# Altium PCB CH32H417QEU-R1.PcbDoc (part 4 of 6)
Units mm, origin at the board's own origin, x right, y up, seen from the top; angles counter-clockwise.
Board outline 125 x 85 mm, 4 copper layers (Top Layer, Layer 1, Layer 2, Bottom Layer), stack 0.603 mm thick; 271 components, 256 nets, 1068 pads, 903 vias.
Unrouted connection lines stored in the file: 143.
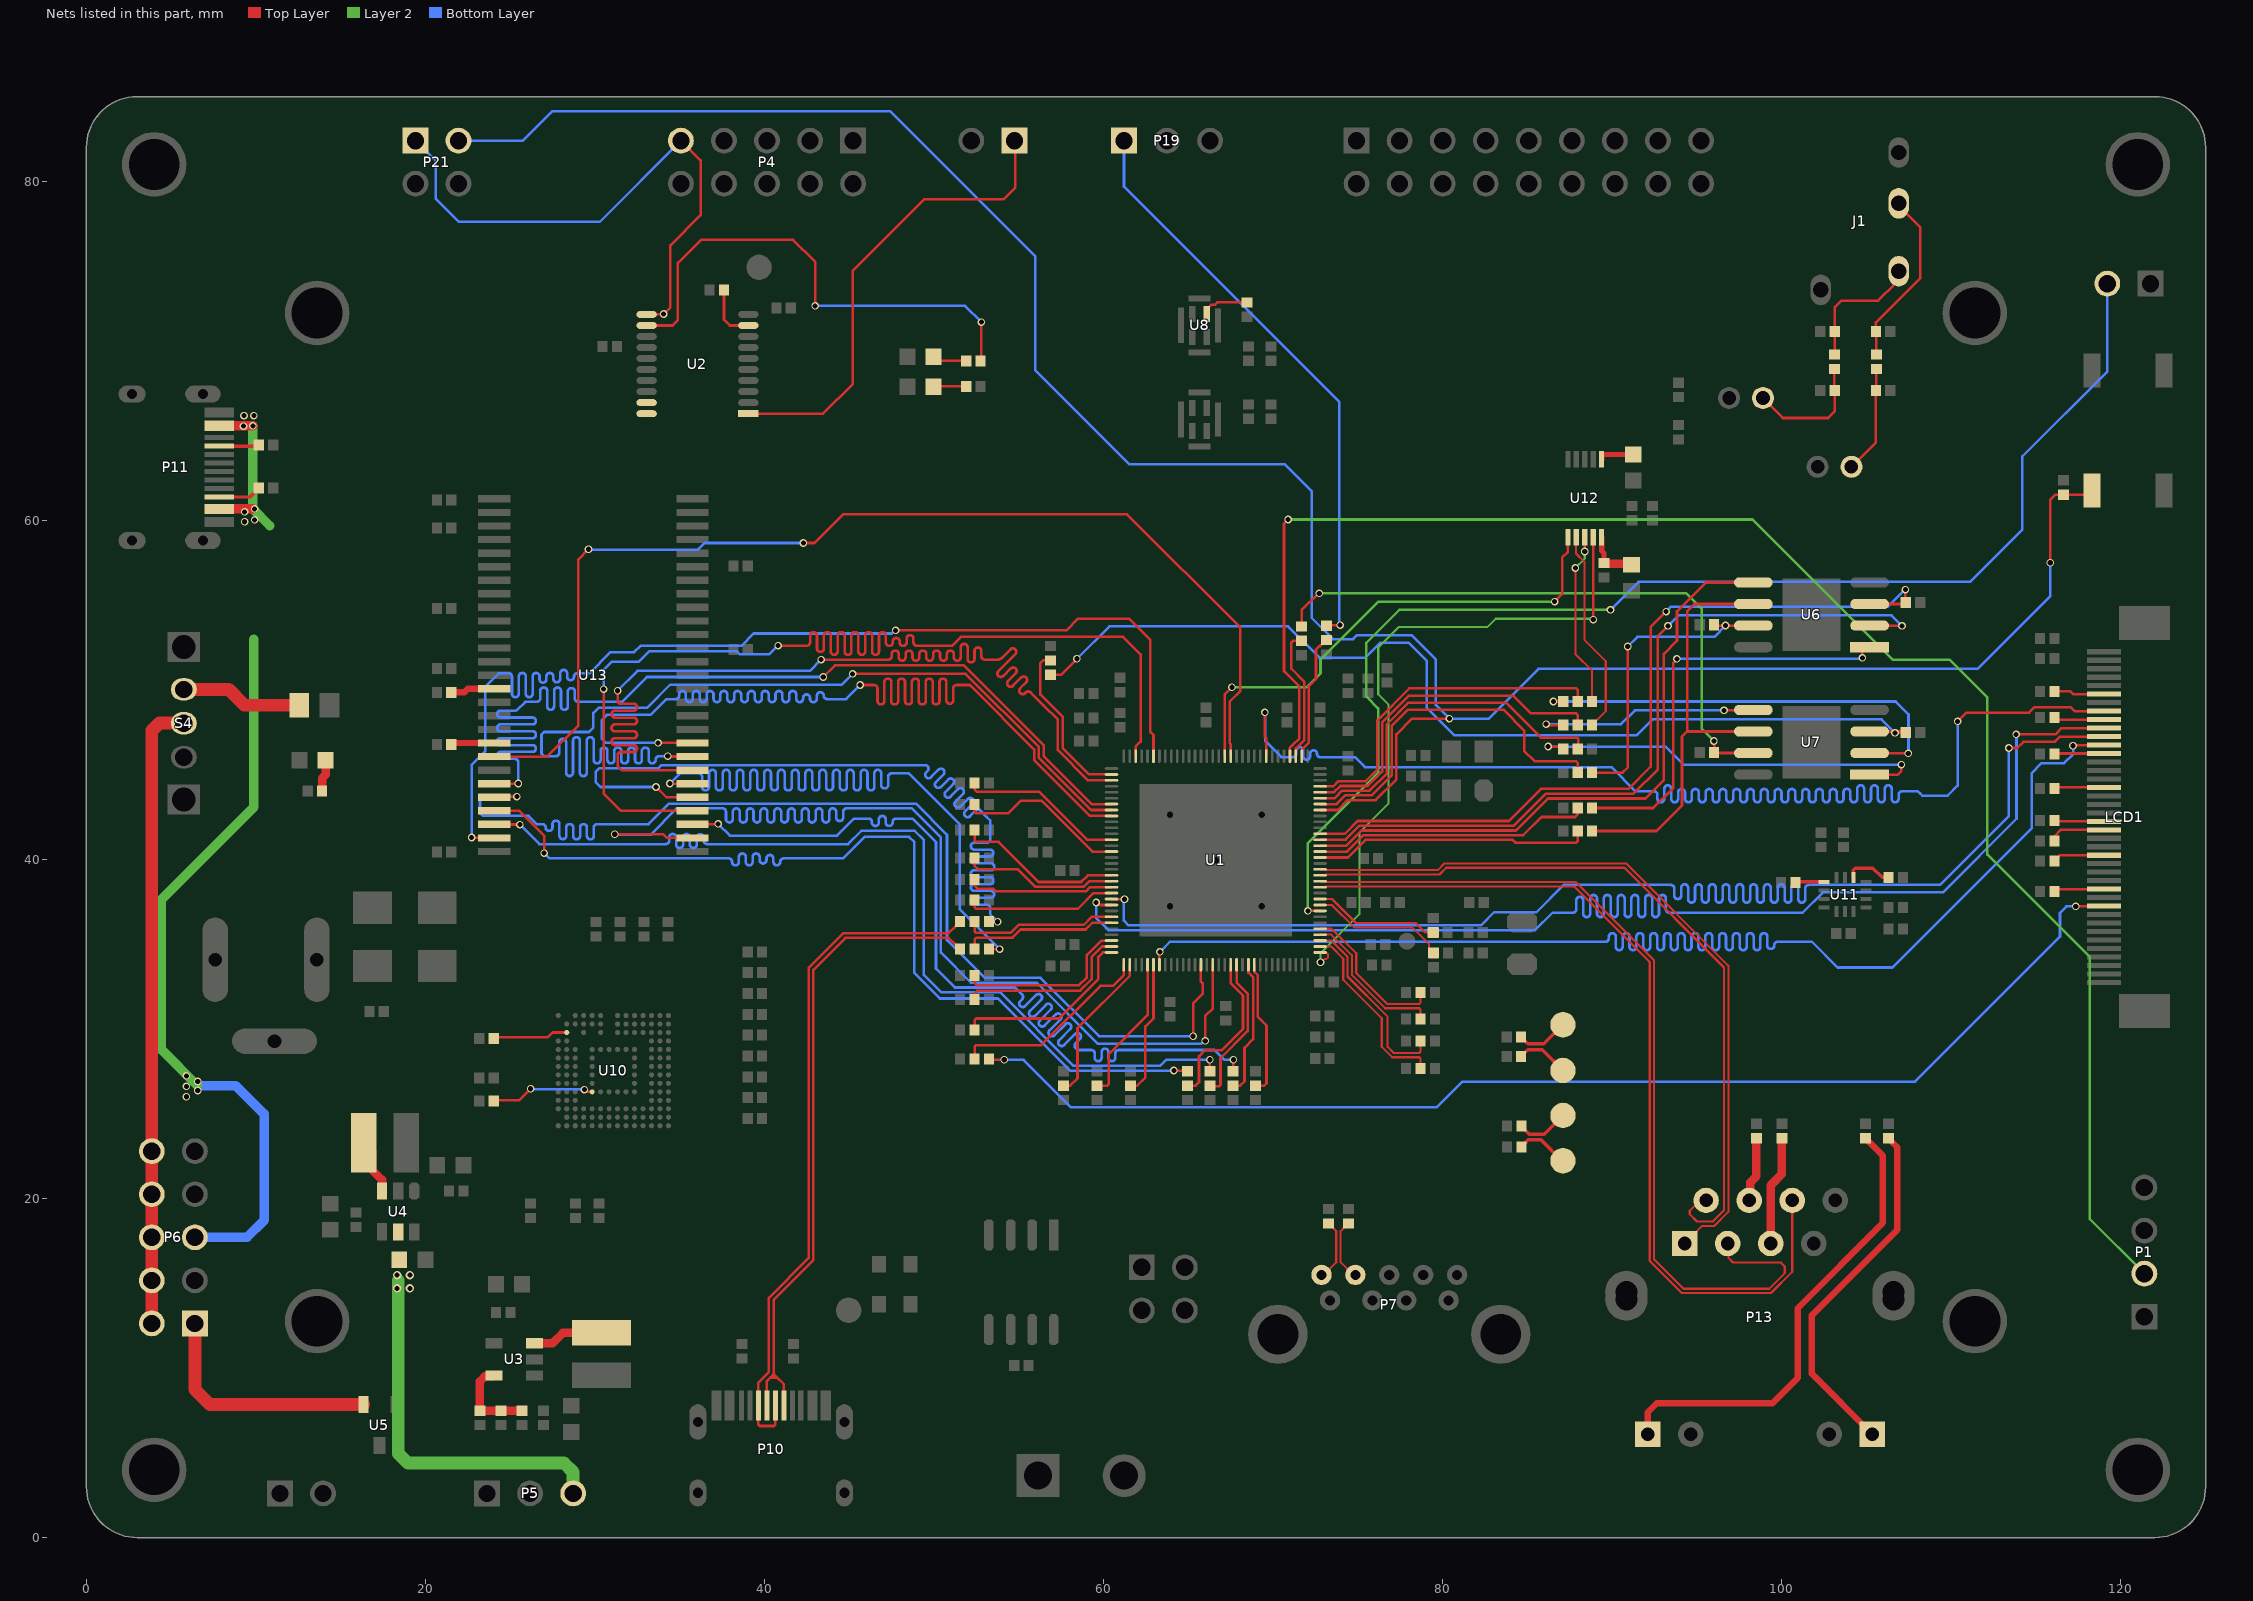
[diagram p6: the nets of this part, all layers, seen from the top]

## Via types
v1: diameter 0.45, hole 0.3, Top Layer to Bottom Layer, tented both sides, 534 vias
v2: diameter 0.5, hole 0.3, Top Layer to Bottom Layer, tented both sides, 320 vias
v3: diameter 0.711, hole 0.406, Top Layer to Bottom Layer, tented both sides, 24 vias
v4: diameter 0.508, hole 0.305, Top Layer to Bottom Layer, tented both sides, 22 vias
v5: diameter 0.7, hole 0.4, Top Layer to Bottom Layer, tented both sides, 3 vias

## Nets (pads, with @x,y where several pads share a name; then routed paths per layer and width w, separated by ;. In a path a pad name is that pad's centre, name@x,y a point inside that pad or via, vN(x,y) a via of type N, cw(c..) or ccw(c..) an arc to the next point about the centre after c; other vN are vias at no path point) (continued)
LCD_R4: LCD1.33 U1.40 | length 84.5
  Top Layer w0.152: v1(69.508,48.678) 69.516,48.67 69.516,47.245 69.591,47.169 U1.40@69.591,46.092 ; v1(110.374,48.144) 110.896,48.666 114.581,48.666 114.886,48.971 117.051,48.971 117.271,48.75 LCD1.33@118.999,48.75
  Bottom Layer w0.152: v1(69.508,48.678) 69.536,48.65 69.536,46.985 70.487,46.033 71.087,46.033 71.163,46.033 ccw(c71.163,46.236) 71.366,46.236 71.366,46.421 cw(c71.57,46.421) 71.773,46.421 71.773,46.093 ccw(c71.976,46.093) 72.179,46.093 72.179,46.236 cw(c72.382,46.236) 72.586,46.236 ccw(c72.789,46.236) 72.789,46.033 74.205,46.033 74.825,46.033 75.416,45.441 89.951,45.441 91.373,44.02 91.982,44.02 92.464,44.02 cw(c92.464,43.817) 92.667,43.817 92.667,43.578 ccw(c92.871,43.578) 93.074,43.578 93.074,44.17 cw(c93.277,44.17) 93.48,44.17 93.48,43.578 ccw(c93.683,43.578) 93.887,43.578 93.887,43.954 cw(c94.09,43.954) 94.293,43.954 94.293,43.578 ccw(c94.496,43.578) 94.699,43.578 94.699,43.954 cw(c94.903,43.954) 95.106,43.954 95.106,43.578 ccw(c95.309,43.578) 95.512,43.578 95.512,43.954 cw(c95.715,43.954) 95.919,43.954 95.919,43.578 ccw(c96.122,43.578) 96.325,43.578 96.325,43.954 cw(c96.528,43.954) 96.731,43.954 96.731,43.578 ccw(c96.935,43.578) 97.138,43.578 97.138,43.954 cw(c97.341,43.954) 97.544,43.954 97.544,43.578 ccw(c97.747,43.578) 97.951,43.578 97.951,43.954 cw(c98.154,43.954) 98.357,43.954 98.357,43.578 ccw(c98.56,43.578) 98.763,43.578 98.763,43.954 cw(c98.967,43.954) 99.17,43.954 99.17,43.578 ccw(c99.373,43.578) 99.576,43.578 99.576,43.954 cw(c99.779,43.954) 99.983,43.954 99.983,43.578 ccw(c100.186,43.578) 100.389,43.578 100.389,43.954 cw(c100.592,43.954) 100.795,43.954 100.795,43.578 ccw(c100.999,43.578) 101.202,43.578 101.202,43.954 cw(c101.405,43.954) 101.608,43.954 101.608,43.578 ccw(c101.811,43.578) 102.015,43.578 102.015,43.954 cw(c102.218,43.954) 102.421,43.954 102.421,43.578 ccw(c102.624,43.578) 102.827,43.578 102.827,43.954 cw(c103.031,43.954) 103.234,43.954 103.234,43.578 ccw(c103.437,43.578) 103.64,43.578 103.64,43.967 cw(c103.843,43.967) 104.047,43.967 104.047,43.578 ccw(c104.25,43.578) 104.453,43.578 104.453,44.17 cw(c104.656,44.17) 104.859,44.17 104.859,43.578 ccw(c105.063,43.578) 105.266,43.578 105.266,44.17 cw(c105.469,44.17) 105.672,44.17 105.672,43.578 ccw(c105.875,43.578) 106.079,43.578 106.079,44.17 cw(c106.282,44.17) 106.485,44.17 106.485,43.578 ccw(c106.688,43.578) 106.891,43.578 106.891,43.817 cw(c107.095,43.817) 107.095,44.02 108.033,44.02 108.159,43.893 108.286,43.767 109.79,43.767 110.374,44.35 v1(110.374,48.144)
LCD_R5: LCD1.31 U1.88 | length 84.6
  Top Layer w0.152: v1(59.559,37.459) 59.64,37.459 59.782,37.317 U1.88@60.466,37.317 ; v1(113.823,47.382) 116.139,47.382 116.508,47.75 LCD1.31@118.999,47.75
  Bottom Layer w0.152: v1(59.559,37.459) 59.559,36.549 60.276,35.832 85.457,35.832 86.483,36.857 86.834,36.857 87.68,36.857 ccw(c87.68,37.061) 87.883,37.061 87.883,37.597 cw(c88.086,37.597) 88.289,37.597 88.289,36.805 ccw(c88.492,36.805) 88.696,36.805 88.696,37.704 cw(c88.899,37.704) 89.102,37.704 89.102,36.805 ccw(c89.305,36.805) 89.508,36.805 89.508,37.704 cw(c89.712,37.704) 89.915,37.704 89.915,36.805 ccw(c90.118,36.805) 90.321,36.805 90.321,37.704 cw(c90.524,37.704) 90.728,37.704 90.728,36.805 ccw(c90.931,36.805) 91.134,36.805 91.134,37.704 cw(c91.337,37.704) 91.54,37.704 91.54,36.805 ccw(c91.744,36.805) 91.947,36.805 91.947,37.704 cw(c92.15,37.704) 92.353,37.704 92.353,36.805 ccw(c92.556,36.805) 92.76,36.805 92.76,37.704 cw(c92.963,37.704) 93.166,37.704 93.166,37.061 ccw(c93.369,37.061) 93.369,36.857 93.852,36.857 101.231,36.857 102.432,38.059 109.502,38.059 113.846,42.402 113.846,47.36 v1(113.823,47.382)
LCD_R6: LCD1.30 U1.87 | length 84.6
  Top Layer w0.152: U1.87@60.466,37.667 U1.87@60.466,37.667 61.215,37.665 v1(61.228,37.652) ; v1(113.392,46.573) 113.89,46.573 114.257,46.94 116.093,46.94 116.403,47.25 116.925,47.25 LCD1.30@118.999,47.25
  Bottom Layer w0.152: v1(61.228,37.652) 61.193,37.617 61.193,36.387 61.469,36.111 82.259,36.111 83.034,36.886 85.52,36.886 87.132,38.499 92.699,38.499 93.46,38.499 cw(c93.46,38.296) 93.663,38.296 93.663,37.869 ccw(c93.866,37.869) 94.069,37.869 94.069,38.333 cw(c94.272,38.333) 94.476,38.333 94.476,37.657 ccw(c94.679,37.657) 94.882,37.657 94.882,38.333 cw(c95.085,38.333) 95.288,38.333 95.288,37.657 ccw(c95.492,37.657) 95.695,37.657 95.695,38.333 cw(c95.898,38.333) 96.101,38.333 96.101,37.657 ccw(c96.304,37.657) 96.508,37.657 96.508,38.333 cw(c96.711,38.333) 96.914,38.333 96.914,37.657 ccw(c97.117,37.657) 97.32,37.657 97.32,38.333 cw(c97.524,38.333) 97.727,38.333 97.727,37.657 ccw(c97.93,37.657) 98.133,37.657 98.133,38.333 cw(c98.336,38.333) 98.54,38.333 98.54,37.657 ccw(c98.743,37.657) 98.946,37.657 98.946,38.333 cw(c99.149,38.333) 99.352,38.333 99.352,37.657 ccw(c99.556,37.657) 99.759,37.657 99.759,38.333 cw(c99.962,38.333) 100.165,38.333 100.165,37.657 ccw(c100.368,37.657) 100.572,37.657 100.572,38.333 cw(c100.775,38.333) 100.978,38.333 100.978,37.657 ccw(c101.181,37.657) 101.384,37.657 101.384,38.296 cw(c101.588,38.296) 101.588,38.499 101.664,38.499 109.333,38.499 113.392,42.558 v1(113.392,46.573)
LCD_R7: LCD1.29 U1.103 | length 84.6
  Top Layer w0.152: U1.103@63.291,33.792 U1.103@63.291,33.792 63.293,34.527 v1(63.316,34.551) ; v1(117.182,46.71) 117.202,46.73 118.979,46.73 LCD1.29@118.999,46.75
  Bottom Layer w0.152: v1(63.316,34.551) 63.913,35.147 89.522,35.147 89.598,35.147 ccw(c89.598,35.35) 89.802,35.35 89.802,35.45 cw(c90.005,35.45) 90.208,35.45 90.208,34.85 ccw(c90.411,34.85) 90.614,34.85 90.614,35.45 cw(c90.818,35.45) 91.021,35.45 91.021,34.85 ccw(c91.224,34.85) 91.427,34.85 91.427,35.45 cw(c91.63,35.45) 91.834,35.45 91.834,34.85 ccw(c92.037,34.85) 92.24,34.85 92.24,35.45 cw(c92.443,35.45) 92.646,35.45 92.646,34.85 ccw(c92.85,34.85) 93.053,34.85 93.053,35.45 cw(c93.256,35.45) 93.459,35.45 93.459,34.85 ccw(c93.662,34.85) 93.866,34.85 93.866,35.45 cw(c94.069,35.45) 94.272,35.45 94.272,34.85 ccw(c94.475,34.85) 94.678,34.85 94.678,35.45 cw(c94.882,35.45) 95.085,35.45 95.085,34.85 ccw(c95.288,34.85) 95.491,34.85 95.491,35.45 cw(c95.694,35.45) 95.898,35.45 95.898,34.85 ccw(c96.101,34.85) 96.304,34.85 96.304,35.45 cw(c96.507,35.45) 96.71,35.45 96.71,34.85 ccw(c96.914,34.85) 97.117,34.85 97.117,35.45 cw(c97.32,35.45) 97.523,35.45 97.523,34.85 ccw(c97.726,34.85) 97.93,34.85 97.93,35.45 cw(c98.133,35.45) 98.336,35.45 98.336,34.85 ccw(c98.539,34.85) 98.742,34.85 98.742,35.45 cw(c98.946,35.45) 99.149,35.45 99.149,34.927 ccw(c99.352,34.927) 99.555,34.927 99.555,34.944 cw(c99.758,34.944) 99.758,35.147 101.364,35.147 101.775,35.147 103.292,33.63 106.525,33.63 114.734,41.838 114.734,45.08 115.332,45.678 116.66,45.678 117.182,46.2 v1(117.182,46.71)
LCD_VS: LCD1.10 R36.1 | length 72.7
  Top Layer w0.152: R36.1@53.237,28.221 53.273,28.185 v1(54.139,28.185) ; v1(117.341,37.232) 117.359,37.25 LCD1.10@118.999,37.25
  Bottom Layer w0.152: v1(54.139,28.185) 55.276,28.185 58.08,25.381 79.645,25.381 81.16,26.896 107.861,26.896 116.412,35.447 116.412,36.85 116.794,37.232 v1(117.341,37.232)
LDO_3V3: C40.2 P5.3 U4.5 | length 22.2
  Layer 2 w0.762: 18.395,15.182 18.395,4.963 18.961,4.398 28.172,4.398 28.713,3.857 P5.3@28.713,2.609
  other v2: 18.324,14.703 19.081,14.703 18.324,15.483 19.081,15.483
LED_CON: R83.1 U2.12 | length 29.7
  Top Layer w0.152: U2.12@33.043,71.498 34.578,71.498 34.893,71.812 34.893,75.182 36.264,76.553 41.689,76.553 42.983,75.258 42.983,72.656 v1(42.987,72.652) ; R83.1@52.744,69.408 52.789,69.453 v1(52.789,71.694)
  Bottom Layer w0.152: v1(42.987,72.652) 51.83,72.652 v1(52.789,71.694)
Link_5V: P6.5 P11.A4 P11.B4 | length 55.1
  Top Layer w0.559: P11.B4@7.846,60.68 v1@9.821,60.68 ; P11.A4@7.846,65.58 9.811,65.58 v1(9.815,65.576)
  Layer 2 w0.559: 6.57,26.648 4.429,28.789 4.429,37.639 9.884,43.094 9.884,53 ; v1(9.815,65.576) 9.815,60.686 9.821,60.68 10.816,59.685
  Bottom Layer w0.559: P6.5@6.397,17.713 9.482,17.713 10.481,18.712 10.481,24.99 8.823,26.648 6.57,26.648
  other v1: 5.896,26.007 6.57,26.375 5.896,26.62 6.57,26.902 5.896,27.233 9.33,59.918 9.923,60.032 9.33,60.507 9.923,60.68 9.268,65.562 9.294,66.183 9.878,66.183
LOUT: C67.2 J1.3 R120.2 | length 10.1
  Top Layer w0.152: R120.2@105.574,69.783 105.574,71.128 C67.2@105.549,71.153 105.549,71.673 108.175,74.298 108.175,77.269 J1.3@107.089,78.354
MDIRN: P13.6 U1.12 | length 52.9
  Top Layer w0.127: U1.12@72.766,38.367 73.095,38.367 73.143,38.415 87.75,38.415 92.21,33.955 92.21,16.316 94.099,14.427 99.365,14.427 100.618,15.68 P13.6@100.618,19.888
MDIRP: P13.3 U1.13 | length 52.9
  Top Layer w0.127: U1.13@72.766,38.717 73.095,38.717 73.143,38.669 87.855,38.669 92.464,34.06 92.464,16.421 94.204,14.681 99.26,14.681 100.178,15.599 100.178,15.991 99.938,16.23 99.821,16.23 ; P13.3@96.808,17.348 96.849,17.307 96.849,16.509 97.128,16.23 98.06,16.23 ; 98.062,16.231 99.823,16.231
MDITN: P13.2 U1.14 | length 44.7
  Top Layer w0.127: U1.14@72.766,39.067 73.095,39.067 73.143,39.115 79.812,39.115 80.205,39.507 90.719,39.507 96.596,33.631 96.596,19.317 95.923,18.643 94.997,18.643 94.576,19.065 94.576,19.284 95.18,19.888 P13.2@95.538,19.888
MDITP: P13.1 U1.15 | length 44.6
  Top Layer w0.127: U1.15@72.766,39.417 73.095,39.417 73.143,39.369 79.707,39.369 80.099,39.761 90.825,39.761 96.85,33.736 96.85,19.212 96.028,18.389 95.309,18.389 P13.1@94.268,17.348
NetC33_2: C33.2 R85.2 R86.2 U3.5 | length 5.2
  Top Layer w0.508: U3.5@24.031,9.559 23.985,9.513 23.507,9.513 23.209,9.216 R86.2@23.209,7.483 R85.2@24.457,7.483 C33.2@25.705,7.483
NetC44_1: C44.1 P7.8 | length 3.7
  Top Layer w0.13: C44.1@74.435,18.532 74.41,18.532 74.175,18.297 74.175,18.272 73.979,18.076 73.979,16.241 74.725,15.495 P7.8@74.851,15.495
NetC45_1: C45.1 P7.9 | length 3.7
  Top Layer w0.13: P7.9@72.851,15.495 72.977,15.495 73.723,16.241 73.723,18.076 73.527,18.272 73.527,18.297 73.292,18.532 C45.1@73.267,18.532
NetC51_2: C51.2 U10.C2 | length 4.5
  Top Layer w0.152: C51.2@24.023,29.45 24.077,29.504 27.201,29.504 27.491,29.794 U10.C2@28.333,29.794
NetC56_2: C56.2 P13.5 | length 6.5
  Top Layer w0.508: P13.5@99.348,17.348 99.348,20.787 100.002,21.441 C56.2@100.002,23.559
NetC57_2: C57.2 P13.4 | length 3.8
  Top Layer w0.508: P13.4@98.078,19.888 98.135,19.945 98.135,20.953 98.503,21.321 C57.2@98.503,23.559
NetC63_2: C63.2 C64.2 U12.5 | length 3.2
  Top Layer w0.305: U12.5@89.379,59.007 89.379,58.188 89.506,58.061 C63.2@89.506,57.481
  Top Layer w0.508: C63.2@89.506,57.481 89.552,57.435 91.091,57.435 C64.2@91.138,57.389
NetC65_2: C65.2 U12.6 | length 2.1
  Top Layer w0.305: U12.6@89.379,63.607 89.379,63.888 89.382,63.891 C65.2@91.242,63.891
NetC66_2: C66.2 R120.1 R122.1 | length 6.4
  Top Layer w0.152: C66.2@104.111,63.162 105.549,64.601 R122.1@105.549,67.651 105.574,67.676 R120.1@105.574,68.933
NetC68_2: C68.2 R123.1 R125.1 | length 7.4
  Top Layer w0.152: C68.2@98.892,67.219 100.071,66.041 102.731,66.041 103.122,66.431 R125.1@103.122,67.651 103.097,67.676 R123.1@103.097,68.933
NetC77_2: C77.2 P15.1 | length 3.1
  Top Layer w0.203: C77.2@84.643,23.053 84.643,23.078 84.842,23.276 84.867,23.276 85.056,23.465 85.798,23.465 87.034,22.229 P15.1@87.095,22.229
NetC78_2: C78.2 P16.1 | length 3.1
  Top Layer w0.203: C78.2@84.643,24.286 84.643,24.261 85.101,23.804 85.996,23.804 P16.1@87.095,24.903
NetC79_2: C79.2 P17.1 | length 3.2
  Top Layer w0.203: C79.2@84.626,28.367 84.626,28.392 84.824,28.59 84.849,28.59 85.033,28.775 85.875,28.775 P17.1@87.095,27.555
NetC80_2: C80.2 P18.1 | length 3.1
  Top Layer w0.203: C80.2@84.626,29.533 84.626,29.508 84.824,29.31 84.849,29.31 85.031,29.128 85.972,29.128 P18.1@87.095,30.25
NetD1_2: D1.2 R83.2 | length 2
  Top Layer w0.152: D1.2@49.971,69.655 50.217,69.408 R83.2@51.894,69.408
NetD2_2: D2.2 R84.2 | length 1.9
  Top Layer w0.152: D2.2@49.971,67.875 49.999,67.903 R84.2@51.894,67.903
NetD3_2: D3.2 R87.1 | length 1.9
  Top Layer w0.508: R87.1@13.902,44.046 13.902,44.795 14.107,45 D3.2@14.107,45.845
NetF1_2: F1.2 S4.2 | length 7.2
  Top Layer w0.762: S4.2@5.747,50.032 8.395,50.032 9.332,49.096 F1.2@12.559,49.096
NetL1_1: L1.1 U3.3 | length 4.2
  Top Layer w0.508: U3.3@26.431,11.459 27.491,11.459 28.106,12.074 L1.1@30.381,12.074
NetL2_1: L2.1 U4.3 | length 3.3
  Top Layer w0.508: L2.1@16.356,23.299 16.852,22.803 16.852,21.685 17.44,21.097 U4.3@17.44,20.433
NetLCD1_12: LCD1.12 R117.1 | length 3
  Top Layer w0.152: R117.1@116.078,38.1 116.228,38.25 LCD1.12@118.999,38.25
NetLCD1_16: LCD1.16 R118.1 | length 3.1
  Top Layer w0.152: R118.1@116.078,39.928 116.302,40.152 116.327,40.152 116.425,40.25 LCD1.16@118.999,40.25
NetLCD1_19: LCD1.19 R119.1 | length 3.4
  Top Layer w0.152: R119.1@116.078,41.097 116.078,41.359 116.482,41.763 117.27,41.763 117.283,41.75 LCD1.19@118.999,41.75
NetLCD1_20: LCD1.20 R116.1 | length 2.9
  Top Layer w0.152: R116.1@116.078,42.291 116.119,42.25 LCD1.20@118.999,42.25
NetLCD1_24: LCD1.24 R115.1 | length 2.9
  Top Layer w0.152: R115.1@116.078,44.196 116.132,44.25 LCD1.24@118.999,44.25
NetLCD1_28: LCD1.28 R112.1 | length 2.9
  Top Layer w0.152: R112.1@116.078,46.228 116.1,46.25 LCD1.28@118.999,46.25
NetLCD1_32: LCD1.32 R113.1 | length 3
  Top Layer w0.152: R113.1@116.078,48.387 116.215,48.25 LCD1.32@118.999,48.25
NetLCD1_35: LCD1.35 R114.1 | length 3
  Top Layer w0.152: R114.1@116.078,49.911 117.028,49.911 117.188,49.75 LCD1.35@118.999,49.75
NetP6_2: P6.2 P6.4 P6.6 P6.8 P6.10 S4.1 | length 36.8
  Top Layer w0.762: P6.2@3.857,12.633 P6.4@3.857,15.173 P6.6@3.857,17.713 P6.8@3.857,20.253 3.857,47.596 4.303,48.043 S4.1@5.515,48.043
NetP11_A5: P11.A5 R88.1 | length 2.3
  Top Layer w0.203: P11.A5@7.846,64.38 10.104,64.38 R88.1@10.168,64.445
NetP11_B5: P11.B5 R89.1 | length 2.6
  Top Layer w0.203: P11.B5@7.846,61.38 9.669,61.38 10.168,61.88 R89.1@10.168,61.905
NetP13_9: P13.9 R108.2 | length 27.6
  Top Layer w0.381: P13.9@92.093,6.096 92.093,7.395 92.628,7.93 99.454,7.93 100.941,9.417 100.941,13.536 105.964,18.559 105.964,22.534 R108.2@104.938,23.559
NetP13_12: P13.12 R109.2 | length 21.2
  Top Layer w0.381: P13.12@105.343,6.096 101.78,9.659 101.78,13.116 106.814,18.15 106.814,23.034 R109.2@106.288,23.559
NetR96_1: R96.1 U8.2 | length 2.8
  Top Layer w0.152: U8.2@66.084,72.176 66.084,72.451 66.356,72.723 66.581,72.723 66.718,72.859 R96.1@68.453,72.859
NetR106_1: R106.1 U10.K5 | length 6.2
  Top Layer w0.152: R106.1@24.023,25.761 24.051,25.789 25.517,25.789 v1(26.203,26.475) ; v1(29.375,26.424) 29.504,26.294 U10.K5@29.833,26.294
  Bottom Layer w0.152: v1(26.203,26.475) 26.229,26.449 29.349,26.449 v1(29.375,26.424)
NetR110_2: R110.2 U11.1 | length 1.7
  Top Layer w0.203: R110.2@100.812,38.635 100.851,38.674 U11.1@102.478,38.674
NetR111_2: R111.2 U11.12 | length 2.8
  Top Layer w0.203: U11.12@104.228,38.924 104.228,39.364 104.347,39.483 105.377,39.483 105.917,38.944 R111.2@106.304,38.944
NetR126_2: R126.2 U13.15 | length 2.6
  Top Layer w0.381: R126.2@21.524,49.854 22.284,49.854 22.5,50.07 U13.15@24.064,50.07
NetR127_1: R127.1 U13.19 | length 2.6
  Top Layer w0.381: R127.1@21.524,46.781 21.613,46.87 U13.19@24.064,46.87
NRST: C19.2 P21.2 S2.1 U1.25 | length 142.3
  Top Layer w0.152: U1.25@72.766,42.917 73.812,42.917 74.393,43.498 76.048,43.498 77.27,44.72 77.27,47.384 78.196,48.31 v1(80.393,48.31) ; v1(115.838,57.5) 115.838,61.22 116.135,61.516 S2.1@118.396,61.516
  Bottom Layer w0.152: P21.2@21.949,82.4 25.75,82.4 27.491,84.141 47.403,84.141 49.069,82.474 55.957,75.587 55.957,68.882 61.535,63.304 70.694,63.304 72.268,61.73 72.268,54.258 73.527,52.999 74.722,52.999 74.955,53.233 78.168,53.233 79.592,51.809 79.592,49.111 v1(80.393,48.31) 82.721,48.31 85.65,51.239 111.55,51.239 115.838,55.527 v1(115.838,57.5)
NRST0: P4.9 P21.1 U2.11 | length 33.5
  Top Layer w0.152: U2.11@33.043,72.148 33.057,72.161 v1@34.037,72.161 ; v1(34.05,72.175) 34.441,72.565 34.441,76.218 36.226,78.003 36.226,81.24 P4.9@35.065,82.4
  Bottom Layer w0.152: P21.1@19.409,82.4 20.61,81.199 20.61,78.969 21.964,77.615 30.28,77.615 P4.9@35.065,82.4
OTG_FS_DM: P10.A7 P10.B7 R47.1 | length 40.4
  Top Layer w0.152: P10.A7@40.638,7.792 40.638,6.672 40.549,6.583 39.727,6.583 39.638,6.672 P10.B7@39.638,7.792 39.638,9.141 40.259,9.761 40.259,14.139 42.602,16.482 42.602,33.608 44.653,35.659 50.863,35.659 51.289,36.085 51.314,36.085 51.537,36.309 R47.1@51.537,36.334
OTG_FS_DP: P10.A6 P10.B6 R49.1 | length 39.3
  Top Layer w0.152: P10.A6@40.138,7.792 40.138,9.245 40.339,9.447 ; P10.B6@41.138,7.792 41.138,9.046 40.737,9.447 ; R49.1@51.537,34.705 51.537,34.73 51.314,34.954 51.289,34.954 50.863,35.38 44.769,35.38 42.881,33.492 42.881,16.366 40.538,14.023 40.538,9.646 ; 40.339,9.447 40.538,9.646 ; 40.339,9.447 40.538,9.447 ; 40.538,9.447 40.538,9.646 ; 40.538,9.447 40.737,9.447 ; 40.538,9.646 40.737,9.447
PA0: R64.2 R65.2 U1.34 | length 7.5
  Top Layer w0.152: U1.34@71.691,46.092 71.693,46.093 71.693,46.477 72.107,46.891 72.107,50.228 72.526,50.647 72.526,52.382 72.738,52.594 72.775,52.594 73.122,52.941 R65.2@73.147,52.941
PA1: R74.2 R75.2 U1.35 | length 7.9
  Top Layer w0.152: U1.35@71.341,46.092 71.343,46.093 71.343,46.545 71.828,47.03 71.828,50.491 71.069,51.25 71.069,52.807 71.158,52.897 R75.2@71.683,52.897
PA2: P1.2 U1.36 | length 98.1
  Top Layer w0.152: v1(70.88,60.053) 70.64,59.813 70.64,51.114 71.548,50.206 71.548,47.146 71.141,46.739 71.131,46.739 70.991,46.598 U1.36@70.991,46.092
  Layer 2 w0.152: v1(70.88,60.053) 98.273,60.053 106.544,51.781 109.906,51.781 112.128,49.56 112.128,40.288 118.178,34.239 118.178,18.779 P1.2@121.387,15.57
PA11: R46.2 R47.2 U1.90 | length 9.1
  Top Layer w0.152: R46.2@52.387,36.334 52.387,35.764 52.481,35.67 54.513,35.67 54.989,36.147 58.829,36.147 59.299,36.617 U1.90@60.466,36.617
PA12: R48.2 R49.2 U1.91 | length 9.1
  Top Layer w0.152: R48.2@52.387,34.705 52.387,35.275 52.503,35.391 54.628,35.391 55.105,35.868 58.945,35.868 59.344,36.267 U1.91@60.466,36.267
PA14: R25.2 R26.2 U1.94 | length 10.4
  Top Layer w0.152: R25.2@52.387,33.148 52.387,32.716 52.515,32.589 58.55,32.589 59.012,33.051 59.012,34.367 59.862,35.217 U1.94@60.466,35.217
PA15: R28.2 R30.2 U1.95 | length 10.4
  Top Layer w0.152: R28.2@52.387,31.735 52.387,32.097 52.553,32.263 58.619,32.263 59.292,32.935 59.292,34.251 59.907,34.867 U1.95@60.466,34.867
PB3: R50.2 R51.2 U1.115 | length 9.6
  Top Layer w0.152: R51.2@64.953,26.657 65.417,26.657 65.626,26.866 65.626,28.392 65.992,28.758 66.98,28.758 68.22,29.998 68.22,31.976 67.491,32.704 U1.115@67.491,33.792
PB4: R52.2 R53.2 U1.116 | length 8.7
  Top Layer w0.152: R53.2@66.288,26.657 66.331,26.614 66.803,26.614 66.892,26.703 66.892,28.275 68.499,29.883 68.499,32.091 67.841,32.749 U1.116@67.841,33.792
PB6: R76.2 R77.2 U1.118 | length 8
  Top Layer w0.152: R77.2@67.623,26.657 68.055,26.657 68.308,26.91 68.308,28.891 68.819,29.402 68.819,33.054 68.541,33.332 U1.118@68.541,33.792
PB7: R79.2 R80.2 U1.119 | length 8
  Top Layer w0.152: U1.119@68.891,33.792 68.893,33.79 68.893,33.376 69.099,33.17 69.099,30.719 69.61,30.208 69.61,26.796 69.47,26.657 R80.2@68.958,26.657
PB13: R72.2 R73.2 U1.66 | length 9.8
  Top Layer w0.152: R73.2@56.863,51.745 56.432,51.745 56.266,51.58 56.266,49.726 57.598,48.394 57.598,46.548 59.13,45.017 U1.66@60.466,45.017
PC0: R62.2 R63.2 U1.26 | length 21.8
  Top Layer w0.152: U1.26@72.766,43.267 73.735,43.267 74.245,43.777 75.187,43.777 75.486,43.777 75.627,43.777 75.809,43.777 76.991,44.958 76.991,45.14 76.991,45.281 76.991,47.861 77.966,48.836 83.575,48.836 84.809,47.602 84.809,46.409 85.423,45.795 87.875,45.795 87.964,45.706 R63.2@87.964,45.127
PC1: R66.2 R67.2 U1.27 | length 20.8
  Top Layer w0.152: U1.27@72.766,43.617 73.635,43.617 74.075,44.056 75.071,44.056 75.37,44.056 75.512,44.056 75.693,44.056 76.711,45.074 76.711,45.256 76.711,45.397 76.711,47.976 77.985,49.25 83.731,49.25 85.797,47.184 87.916,47.184 88.005,47.094 88.005,46.564 R67.2@87.964,46.524
PC2: R68.2 R69.2 U1.28 | length 20.3
  Top Layer w0.152: U1.28@72.766,43.967 73.59,43.967 73.959,44.336 74.955,44.336 75.255,44.336 75.396,44.336 75.578,44.336 76.432,45.19 76.432,45.372 76.432,45.513 76.432,48.092 77.989,49.65 84.184,49.65 85.21,48.624 87.875,48.624 87.964,48.535 R69.2@87.964,47.921
PC3: R70.2 R71.2 U1.29 | length 20
  Top Layer w0.152: U1.29@72.766,44.317 73.545,44.317 73.843,44.615 75.462,44.615 76.152,45.306 76.152,48.208 78.044,50.1 87.875,50.1 87.964,50.01 R71.2@87.964,49.318
PC6: R13.2 R14.2 U1.83 | length 9.9
  Top Layer w0.152: R13.2@52.387,41.725 52.387,41.123 52.477,41.034 53.798,41.034 56.159,38.674 58.675,38.674 59.068,39.067 U1.83@60.466,39.067
PC6_305: R81.2 U2.9 | length 3.3
  Top Layer w0.152: R81.2@37.607,73.578 37.607,71.845 37.955,71.498 U2.9@39.044,71.498
PC7: R16.2 R18.2 U1.84 | length 9.2
  Top Layer w0.152: R16.2@52.387,40.074 52.387,39.626 52.586,39.428 54.928,39.428 55.962,38.394 58.833,38.394 59.155,38.717 U1.84@60.466,38.717
PC8: R19.2 R21.2 U1.85 | length 8.7
  Top Layer w0.152: R19.2@52.387,38.829 52.387,38.455 52.557,38.285 53.485,38.285 53.655,38.115 58.952,38.115 59.204,38.367 U1.85@60.466,38.367
PC9: R23.2 R24.2 U1.86 | length 8.9
  Top Layer w0.152: R23.2@52.387,37.62 52.387,37.188 52.484,37.091 58.474,37.091 59.4,38.017 U1.86@60.466,38.017
PC10: R32.2 R34.2 U1.96 | length 11.1
  Top Layer w0.152: R32.2@52.387,29.957 R32.2@52.387,29.932 52.387,30.519 52.49,30.622 57.373,30.622 59.688,32.937 59.688,34.253 59.952,34.517 U1.96@60.466,34.517
PC11: R36.2 R38.2 U1.97 | length 11.9
  Top Layer w0.152: R36.2@52.387,28.221 52.387,28.957 52.477,29.046 56.307,29.046 59.809,32.549 60.559,32.549 61.191,33.182 U1.97@61.191,33.792
PC12: R40.2 R41.2 U1.98 | length 9
  Top Layer w0.152: R41.2@57.632,26.657 58.028,26.657 58.46,27.089 58.46,30.055 61.541,33.136 U1.98@61.541,33.792
PC13: P2.2 U1.8 | length 76.6
  Top Layer w0.152: v1(72.048,36.967) U1.8@72.766,36.967
  Layer 2 w0.152: v1(72.048,36.967) 72.048,40.962 76.197,45.111 76.197,48.911 75.496,49.612 75.496,52.783 77.438,54.725 v1(89.899,54.725)
  Bottom Layer w0.152: v1(89.899,54.725) 91.547,56.373 111.111,56.373 114.194,59.456 114.194,63.784 119.202,68.792 P2.2@119.202,73.965
PC14: R1.2 R2.2 U1.9 | length 8
  Top Layer w0.127: U1.9@72.766,37.317 73.463,37.317 74.784,35.995 78.198,35.995 79.2,34.993 79.2,34.73 79.436,34.494 R1.2@79.461,34.494
PC15: R3.2 R4.2 U1.10 | length 7.5
  Top Layer w0.127: U1.10@72.766,37.667 73.472,37.667 74.088,37.051 74.889,36.249 78.417,36.249 78.971,35.695 R3.2@79.443,35.695
PD0_305: U2.19
PD1_305: U2.20
PD2: R42.2 R43.2 U1.101 | length 8.7
  Top Layer w0.152: R43.2@59.613,26.657 60.221,26.657 60.31,26.746 60.31,28.533 62.591,30.814 U1.101@62.591,33.792
PD3: R44.2 R45.2 U1.102 | length 7.9
  Top Layer w0.152: R45.2@61.594,26.657 61.984,26.657 62.458,27.131 62.458,30.147 62.941,30.631 U1.102@62.941,33.792
PE3: R54.2 R55.2 U1.2 | length 11
  Top Layer w0.127: U1.2@72.766,34.867 73.418,34.867 74.135,34.15 74.135,32.905 76.404,30.636 76.404,28.947 77.017,28.334 78.619,28.334 78.694,28.259 R55.2@78.694,27.674
PE4: R56.2 R57.2 U1.3 | length 11
  Top Layer w0.127: U1.3@72.766,35.217 73.427,35.217 74.389,34.255 74.389,33.093 76.754,30.728 76.754,28.956 77.122,28.588 78.61,28.588 78.694,28.672 R57.2@78.694,29.282
PE5: R58.2 R59.2 U1.4 | length 9
  Top Layer w0.127: U1.4@72.766,35.567 73.436,35.567 74.643,34.36 74.643,33.386 74.643,33.198 76.614,31.227 76.803,31.227 78.619,31.227 78.694,31.152 R59.2@78.694,30.578
PE6: R60.2 R61.2 U1.5 | length 9.1
  Top Layer w0.127: U1.5@72.766,35.917 73.445,35.917 74.897,34.465 74.897,33.303 76.719,31.481 78.619,31.481 78.694,31.555 R61.2@78.694,32.147
PF0: R9.2 R10.2 U1.77 | length 9.7
  Top Layer w0.152: R9.2@52.387,44.494 R9.2@52.387,44.519 52.387,44.13 52.527,43.991 56.204,43.991 59.028,41.167 U1.77@60.466,41.167
PF2: R11.2 R12.2 U1.79 | length 10.1
  Top Layer w0.152: R11.2@52.387,43.249 52.387,42.817 52.484,42.721 54.372,42.721 55.117,43.465 56.335,43.465 59.333,40.467 U1.79@60.466,40.467
PF6: R5.2 R6.2 U1.17 | length 16.3
  Top Layer w0.152: U1.17@72.766,40.117 74.406,40.117 75.441,41.152 84.128,41.152 84.286,40.993 87.875,40.993 87.964,41.083 R6.2@87.964,41.678
PF7: R7.2 R8.2 U1.18 | length 16.5
  Top Layer w0.152: U1.18@72.766,40.467 74.361,40.467 75.326,41.432 84.752,41.432 85.827,42.507 87.814,42.507 87.964,42.657 R8.2@87.964,43.035
PIN_5V: P6.1 U5.2 | length 14.2
  Top Layer w0.762: P6.1@6.279,12.626 6.397,12.508 6.397,8.739 7.295,7.841 U5.2@16.336,7.841
PIOC_IO0: P19.1 R65.1 | length 34.7
  Top Layer w0.152: R65.1@73.147,53.791 73.179,53.822 v1(73.948,53.822)
  Bottom Layer w0.152: P19.1@61.2,82.4 61.2,79.689 73.908,66.981 73.908,53.862 v1(73.948,53.822)
QSPI_CS: R7.1 U6.1 | length 24.9
  Top Layer w0.152: R7.1@88.814,43.035 92.412,43.035 93.607,44.229 93.607,51.592 93.814,51.8 v1(93.814,51.831) ; v1(104.755,51.891) 104.755,52.299 104.984,52.527 U6.1@105.181,52.527
  Bottom Layer w0.152: v1(93.814,51.831) 104.614,51.831 104.674,51.891 v1(104.755,51.891)
QSPI_SCK: R5.1 U6.6 U7.6 | length 25.5
  Top Layer w0.152: R5.1@88.814,41.678 92.605,41.678 94.114,43.187 94.114,47.244 94.418,47.549 ; U7.6@98.323,47.549 94.418,47.549 ; U6.6@98.323,55.067 94.846,55.067 94.418,54.639 94.418,47.549
QSPI_SCSXN: R67.1 U7.1 | length 24.6
  Top Layer w0.152: v1(86.219,46.661) 86.977,46.661 R67.1@87.114,46.524 ; U7.1@105.181,45.009 106.854,45.009 107.058,45.213 v1(107.058,45.598)
  Bottom Layer w0.152: v1(86.219,46.661) 93.147,46.661 94.21,45.598 v1(107.058,45.598)
QSPI_SIO0: U1.19 U6.5 | length 37.4
  Top Layer w0.152: U1.19@72.766,40.817 74.316,40.817 75.21,41.711 84.313,41.711 86.2,43.598 91.963,43.598 93.044,44.679 93.044,52.128 93.82,52.904 93.82,54.631 95.526,56.337 U6.5@98.323,56.337
QSPI_SIO1: U1.20 U6.2 | length 46.6
  Top Layer w0.152: U1.20@72.766,41.167 74.27,41.167 75.094,41.99 84.194,41.99 86.083,43.88 91.246,43.88 92.687,45.32 92.687,53.177 v1(93.293,53.783) ; U6.2@105.181,53.797 105.19,53.788 107.085,53.788 v1(107.094,53.78)
  Bottom Layer w0.152: v1(93.293,53.783) 93.91,54.4 106.474,54.4 v1(107.094,53.78)
QSPI_SIO2: R93.1 U1.21 U6.3 | length 48.3
  Top Layer w0.152: U1.21@72.766,41.517 74.225,41.517 74.978,42.27 83.908,42.27 85.798,44.16 90.961,44.16 92.27,45.469 92.27,53.709 v1(93.179,54.618) ; U6.3@105.181,55.067 107.239,55.067 R93.1@107.315,55.143 107.293,55.165 v1(107.293,55.92)
  Bottom Layer w0.152: v1(93.179,54.618) 93.477,54.916 106.254,54.916 107.258,55.92 v1(107.293,55.92)
QSPI_SIO3: R62.1 R92.2 U6.7 | length 18
  Top Layer w0.152: R62.1@88.814,45.127 90.618,45.127 90.916,45.424 v1(90.916,52.565) ; R92.2@96.012,53.845 96.06,53.797 v1(96.684,53.797) U6.7@98.323,53.797
  Bottom Layer w0.152: v1(90.916,52.565) 91.486,53.136 96.023,53.136 v1(96.684,53.797)
QSPI_SIOX0: R69.1 U7.5 | length 13.6
  Top Layer w0.152: v1(86.104,47.983) 86.166,47.921 R69.1@87.114,47.921 ; v1(96.589,48.798) 96.6,48.808 98.313,48.808 U7.5@98.323,48.819
  Bottom Layer w0.152: v1(86.104,47.983) 90.525,47.983 91.34,48.798 v1(96.589,48.798)
QSPI_SIOX1: R71.1 U7.2 | length 26.4
  Top Layer w0.152: v1(86.526,49.318) R71.1@87.114,49.318 ; U7.2@105.181,46.279 105.19,46.27 107.454,46.27 v1(107.463,46.261)
  Bottom Layer w0.152: v1(86.526,49.318) 106.722,49.318 107.477,48.562 107.477,46.275 v1(107.463,46.261)
QSPI_SIOX2: R73.1 R95.1 U7.3 | length 59.5
  Top Layer w0.152: R73.1@56.863,50.895 56.867,50.892 57.478,50.892 58.42,51.834 v1(58.42,51.839) ; U7.3@105.181,47.549 R95.1@107.264,47.549 ; v1(106.682,47.468) 107.184,47.468 R95.1@107.264,47.549 ; R95.1@107.315,47.498 R95.1@107.264,47.549
  Bottom Layer w0.152: v1(58.42,51.839) 58.425,51.839 60.333,53.747 70.879,53.747 72.726,51.9 75.454,51.9 76.343,52.788 77.98,52.788 79.062,51.706 79.062,48.945 80.688,47.319 91.425,47.319 92.369,48.263 105.887,48.263 v1(106.682,47.468)
QSPI_SIOX3: R75.1 R94.2 U7.7 | length 36.7
  Top Layer w0.152: R75.1@71.683,53.747 71.683,54.711 72.664,55.692 v1(72.721,55.692) ; R94.2@95.783,46.279 U7.7@98.323,46.279 ; R94.2@96.012,46.304 v1@96.012,46.984
  Layer 2 w0.152: v1(72.721,55.692) 94.376,55.692 95.269,54.799 95.269,47.715 v1(95.999,46.985)
ROUT: C69.2 J1.2 R123.2 | length 8.2
  Top Layer w0.152: R123.2@103.097,69.783 103.122,69.808 C69.2@103.122,71.178 ; C69.2@103.122,71.153 103.122,72.56 103.522,72.96 105.685,72.96 106.7,73.975 106.7,74.73 J1.2@107.005,75.036
RST: P3.1 U2.1 | length 28
  Top Layer w0.152: U2.1@39.044,66.298 43.45,66.298 45.206,68.055 45.206,74.729 49.425,78.949 54.12,78.949 54.798,79.626 P3.1@54.798,82.415
SAI_FS: R70.1 U12.3 | length 10.3
  Top Layer w0.127: v1(87.827,57.195) 87.827,52.119 88.814,51.132 R70.1@88.814,49.318 ; v1(88.379,58.166) U12.3@88.379,59.007
  Layer 2 w0.127: v1(87.827,57.195) 88.379,57.747 v1(88.379,58.166)
SAI_MCLK: U1.1 U12.4 | length 40
  Top Layer w0.127: U1.1@72.766,34.517 72.773,34.51 73.141,34.51 73.226,34.426 73.226,34.209 73.152,34.135 73.038,34.135 72.839,33.936 v1(72.793,33.936) ; U12.4@88.879,59.007 88.885,59.002 v1@88.885,54.145
  Layer 2 w0.127: v1(72.793,33.936) 72.793,34.472 75.087,36.766 75.087,41.582 76.797,43.292 76.797,49.148 76.202,49.743 76.202,52.499 77.421,53.718 82.649,53.718 83.13,54.199 88.829,54.199 v1(88.883,54.145)
SAI_SCK: R68.1 U12.2 | length 12.2
  Top Layer w0.127: U12.2@87.879,59.007 87.863,58.991 87.863,58.048 88.373,57.538 88.373,52.935 89.616,51.692 89.616,48.748 88.814,47.946 R68.1@88.814,47.921
SAI_SD: U1.47 U12.1 | length 30
  Top Layer w0.152: U1.47@67.141,46.092 67.141,49.736 v1(67.565,50.159) ; v1(86.601,55.21) 87.047,55.657 87.047,57.816 87.379,58.148 U12.1@87.379,59.007
  Layer 2 w0.152: v1(67.565,50.159) 71.978,50.159 72.793,50.973 72.793,51.785 76.218,55.21 v1(86.601,55.21)
SDRAM_A0: U1.110 U13.23 | length 66.3
  Top Layer w0.152: U13.23@24.064,43.67 24.083,43.689 25.369,43.689 v1(25.388,43.709) ; v1(65.284,29.574) 65.284,31.514 65.845,32.074 65.845,32.691 65.741,32.795 U1.110@65.741,33.792
  Bottom Layer w0.152: v1(25.388,43.709) 23.345,43.709 23.215,43.579 23.215,42.734 23.379,42.571 26.078,42.571 26.339,42.31 26.56,42.089 26.883,42.089 cw(c26.883,41.886) 27.086,41.886 ccw(c27.289,41.886) 27.492,41.886 27.492,42.089 cw(c27.695,42.089) 27.899,42.089 27.899,41.404 ccw(c28.102,41.404) 28.305,41.404 28.305,41.886 cw(c28.508,41.886) 28.711,41.886 28.711,41.39 ccw(c28.915,41.39) 29.118,41.39 29.118,41.886 cw(c29.321,41.886) 29.524,41.886 29.524,41.39 ccw(c29.727,41.39) 29.931,41.39 29.931,41.886 cw(c30.134,41.886) 30.134,42.089 31.023,42.089 33.158,42.089 34.361,43.292 48.923,43.292 50.76,41.454 50.76,35.246 52.994,33.012 56.276,33.012 59.715,29.574 v1(65.284,29.574)
SDRAM_A1: R50.1 U13.24 | length 56.7
  Top Layer w0.152: U13.24@24.064,42.87 25.533,42.871 27,41.403 v1(27,40.37) ; v1(64.14,27.55) 64.91,27.55 R50.1@64.953,27.507
  Bottom Layer w0.152: v1(27,40.37) 27.307,40.064 37.396,40.064 37.879,40.064 cw(c37.879,39.86) 38.082,39.86 38.082,39.857 ccw(c38.285,39.857) 38.488,39.857 38.488,40.149 cw(c38.691,40.149) 38.895,40.149 38.895,39.857 ccw(c39.098,39.857) 39.301,39.857 39.301,40.149 cw(c39.504,40.149) 39.707,40.149 39.707,39.965 ccw(c39.911,39.965) 40.114,39.965 40.114,40.064 cw(c40.317,40.064) 40.52,40.064 40.52,39.86 ccw(c40.723,39.86) 40.927,39.86 cw(c41.13,39.86) 41.13,40.064 42.312,40.064 44.634,40.064 45.904,41.334 48.534,41.334 48.834,41.034 48.834,33.31 50.343,31.8 53.765,31.8 58.022,27.544 v1@64.14,27.544
SDRAM_A2: R52.1 U13.25 | length 57.7
  Top Layer w0.152: U13.25@24.064,42.07 24.07,42.064 25.561,42.064 v1(25.567,42.059) ; v1(66.271,28.189) 66.271,27.524 R52.1@66.288,27.507
  Bottom Layer w0.152: v1(25.567,42.059) 26.718,40.908 34.101,40.908 34.177,40.908 ccw(c34.177,41.111) 34.381,41.111 34.381,41.3 cw(c34.584,41.3) 34.787,41.3 34.787,40.882 ccw(c34.99,40.882) 35.193,40.882 35.193,41.3 cw(c35.397,41.3) 35.6,41.3 35.6,40.882 ccw(c35.803,40.882) 36.006,40.882 36.006,41.283 cw(c36.209,41.283) 36.413,41.283 36.413,41.111 ccw(c36.616,41.111) 36.616,40.908 37.447,40.908 44.924,40.908 45.711,41.695 48.857,41.695 49.401,41.15 49.401,33.188 50.419,32.17 53.876,32.17 58.223,27.823 63.331,27.823 63.697,28.189 v1(66.271,28.189)
SDRAM_A3: U1.59 U13.26 | length 66.3
  Top Layer w0.152: v1(22.722,41.296) 22.735,41.283 24.051,41.283 U13.26@24.064,41.27 ; v1(47.732,53.517) 57.81,53.517 58.499,54.206 61.488,54.206 62.756,52.938 62.756,47.518 62.941,47.333 U1.59@62.941,46.092
  Bottom Layer w0.152: v1(22.722,41.296) 22.722,45.581 23.523,46.381 23.523,50.18 24.322,50.979 24.417,50.979 24.899,50.979 cw(c24.899,50.776) 25.103,50.776 25.103,49.775 ccw(c25.306,49.775) 25.509,49.775 25.509,50.799 cw(c25.712,50.799) 25.915,50.799 25.915,49.781 ccw(c26.119,49.781) 26.322,49.781 26.322,50.799 cw(c26.525,50.799) 26.728,50.799 26.728,50.629 ccw(c26.931,50.629) 27.135,50.629 27.135,50.799 cw(c27.338,50.799) 27.541,50.799 27.541,50.655 ccw(c27.744,50.655) 27.947,50.655 27.947,50.979 cw(c28.151,50.979) 28.354,50.979 28.354,50.776 ccw(c28.557,50.776) 28.76,50.776 cw(c28.963,50.776) 28.963,50.979 29.498,50.979 29.666,50.979 30.916,52.228 32.31,52.228 32.687,52.605 38.628,52.605 39.352,53.329 47.494,53.329 47.682,53.517 v1(47.732,53.517)
SDRAM_A4: U1.112 U13.29 | length 66.3
  Top Layer w0.152: v1(31.164,41.488) 31.174,41.479 34.03,41.479 34.238,41.27 U13.29@35.748,41.27 ; v1(65.994,29.305) 65.994,30.774 66.441,31.222 U1.112@66.441,33.792
  Bottom Layer w0.152: v1(31.164,41.488) 31.198,41.454 33.262,41.454 34.819,43.012 37.04,43.012 37.522,43.012 cw(c37.522,42.809) 37.725,42.809 37.725,42.384 ccw(c37.929,42.384) 38.132,42.384 38.132,42.809 cw(c38.335,42.809) 38.538,42.809 38.538,42.384 ccw(c38.741,42.384) 38.945,42.384 38.945,42.809 cw(c39.148,42.809) 39.351,42.809 39.351,42.384 ccw(c39.554,42.384) 39.757,42.384 39.757,42.809 cw(c39.961,42.809) 40.164,42.809 40.164,42.384 ccw(c40.367,42.384) 40.57,42.384 40.57,42.809 cw(c40.773,42.809) 40.977,42.809 40.977,42.384 ccw(c41.18,42.384) 41.383,42.384 41.383,42.809 cw(c41.586,42.809) 41.789,42.809 41.789,42.384 ccw(c41.993,42.384) 42.196,42.384 42.196,42.809 cw(c42.399,42.809) 42.602,42.809 42.602,42.384 ccw(c42.805,42.384) 43.009,42.384 43.009,42.809 cw(c43.212,42.809) 43.415,42.809 43.415,42.384 ccw(c43.618,42.384) 43.821,42.384 43.821,42.809 cw(c44.025,42.809) 44.228,42.809 44.228,42.471 ccw(c44.431,42.471) 44.634,42.471 44.634,42.809 cw(c44.837,42.809) 44.837,43.012 45.556,43.012 48.688,43.012 50.395,41.305 50.395,34.507 52.173,32.729 56.061,32.729 59.669,29.12 65.756,29.12 65.94,29.305 v1(65.994,29.305)
SDRAM_A5: R76.1 U13.30 | length 58.3
  Top Layer w0.152: U13.30@35.748,42.07 35.764,42.086 37.249,42.086 v1(37.265,42.103) ; R76.1@67.623,27.507 67.655,27.538 v1(67.655,28.188)
  Bottom Layer w0.152: v1(37.265,42.103) 37.965,41.402 44.279,41.402 45.284,42.408 45.649,42.408 46.131,42.408 cw(c46.131,42.204) 46.335,42.204 46.335,42.177 ccw(c46.538,42.177) 46.741,42.177 46.741,42.365 cw(c46.944,42.365) 47.147,42.365 47.147,42.184 ccw(c47.351,42.184) 47.554,42.184 47.554,42.204 cw(c47.757,42.204) 47.757,42.408 48.298,42.408 48.731,42.408 50.116,41.023 50.116,33.561 51.228,32.449 53.916,32.449 54.777,32.449 55.19,32.036 cw(c55.047,31.892) 55.19,31.748 55.085,31.643 ccw(c55.229,31.5) 55.085,31.356 ccw(c55.229,31.5) 55.373,31.356 56.02,32.003 cw(c56.164,31.859) 56.307,32.003 cw(c56.164,31.859) 56.307,31.716 55.66,31.068 ccw(c55.804,30.925) 55.66,30.781 ccw(c55.804,30.925) 55.947,30.781 56.595,31.428 cw(c56.738,31.285) 56.882,31.428 cw(c56.738,31.285) 56.882,31.141 56.235,30.494 ccw(c56.378,30.35) 56.235,30.206 ccw(c56.378,30.35) 56.522,30.206 57.169,30.854 cw(c57.313,30.71) 57.457,30.854 cw(c57.313,30.71) 57.457,30.566 56.81,29.919 ccw(c56.953,29.775) 56.81,29.632 ccw(c56.953,29.775) 57.097,29.632 57.744,30.279 cw(c57.888,30.135) 58.032,30.279 cw(c57.888,30.135) 58.032,29.992 57.384,29.344 ccw(c57.528,29.201) 57.384,29.057 ccw(c57.528,29.201) 57.672,29.057 58.319,29.704 cw(c58.463,29.561) 58.606,29.704 cw(c58.463,29.561) 58.606,29.417 58.351,29.162 ccw(c58.495,29.018) 58.351,28.875 58.466,28.76 58.787,28.76 59.269,28.76 cw(c59.269,28.557) 59.472,28.557 59.472,28.306 ccw(c59.676,28.306) 59.879,28.306 59.879,28.637 cw(c60.082,28.637) 60.285,28.637 60.285,28.306 ccw(c60.488,28.306) 60.692,28.306 60.692,28.557 cw(c60.895,28.557) 60.895,28.76 62.171,28.76 66.535,28.76 67.106,28.188 v1(67.655,28.188)
SDRAM_A6: U1.62 U13.31 | length 66.2
  Top Layer w0.152: v1(30.506,50.05) 30.506,43.888 31.524,42.87 U13.31@35.748,42.87 ; v1(40.805,52.614) 40.816,52.603 42.408,52.603 42.484,52.603 ccw(c42.484,52.806) 42.687,52.806 42.687,53.208 cw(c42.89,53.208) 43.094,53.208 43.094,52.447 ccw(c43.297,52.447) 43.5,52.447 43.5,53.208 cw(c43.703,53.208) 43.906,53.208 43.906,52.273 ccw(c44.11,52.273) 44.313,52.273 44.313,53.208 cw(c44.516,53.208) 44.719,53.208 44.719,52.273 ccw(c44.922,52.273) 45.126,52.273 45.126,53.208 cw(c45.329,53.208) 45.532,53.208 45.532,52.273 ccw(c45.735,52.273) 45.938,52.273 45.938,53.208 cw(c46.142,53.208) 46.345,53.208 46.345,52.273 ccw(c46.548,52.273) 46.751,52.273 46.751,53.208 cw(c46.954,53.208) 47.158,53.208 47.158,52.799 ccw(c47.361,52.799) 47.564,52.799 47.564,52.86 cw(c47.767,52.86) 47.97,52.86 47.97,52.799 ccw(c48.174,52.799) 48.377,52.799 48.377,53.034 cw(c48.58,53.034) 48.783,53.034 48.783,52.806 ccw(c48.986,52.806) 48.986,52.603 49.926,52.603 51.063,52.603 51.586,53.126 61.142,53.126 62.18,52.088 62.18,46.949 61.891,46.661 U1.62@61.891,46.092
  Bottom Layer w0.152: v1(30.506,50.05) 30.506,51.181 30.99,51.665 32.588,51.665 33.216,52.292 38.359,52.292 38.538,52.113 40.288,52.113 v1@40.797,52.622
SDRAM_A7: R46.1 U13.32 | length 57.3
  Top Layer w0.152: v1(33.6,44.276) 34.206,43.67 U13.32@35.748,43.67 ; R46.1@53.237,36.334 53.244,36.327 v1(53.752,36.327)
  Bottom Layer w0.152: v1(33.6,44.276) 30.324,44.276 30.047,44.553 30.047,45.175 30.263,45.391 33.75,45.391 33.925,45.566 49.134,45.566 49.469,45.566 cw(c49.469,45.363) 49.613,45.219 49.534,45.14 ccw(c49.678,44.996) 49.534,44.852 ccw(c49.678,44.996) 49.821,44.852 50.265,45.296 cw(c50.409,45.152) 50.552,45.296 cw(c50.409,45.152) 50.552,45.009 50.109,44.565 ccw(c50.252,44.421) 50.109,44.278 ccw(c50.252,44.421) 50.396,44.278 50.84,44.721 cw(c50.983,44.578) 51.127,44.721 cw(c50.983,44.578) 51.127,44.434 50.683,43.99 ccw(c50.827,43.847) 50.683,43.703 ccw(c50.827,43.847) 50.971,43.703 51.415,44.147 cw(c51.558,44.003) 51.702,44.147 cw(c51.558,44.003) 51.702,43.859 51.258,43.416 ccw(c51.402,43.272) 51.258,43.128 ccw(c51.402,43.272) 51.546,43.128 51.989,43.572 cw(c52.133,43.428) 52.277,43.572 cw(c52.133,43.428) 52.277,43.285 51.833,42.841 ccw(c51.977,42.697) 51.833,42.554 ccw(c51.977,42.697) 52.12,42.554 52.448,42.882 cw(c52.592,42.738) 52.736,42.882 53.1,42.518 53.314,42.304 53.314,41.675 53.314,41.192 cw(c53.111,41.192) 53.111,40.989 52.374,40.989 ccw(c52.374,40.786) 52.374,40.582 53.293,40.582 cw(c53.293,40.379) 53.293,40.176 52.374,40.176 ccw(c52.374,39.973) 52.374,39.77 53.353,39.77 cw(c53.353,39.566) 53.353,39.363 52.374,39.363 ccw(c52.374,39.16) 52.374,38.957 53.299,38.957 cw(c53.299,38.754) 53.299,38.55 52.374,38.55 ccw(c52.374,38.347) 52.374,38.144 53.342,38.144 cw(c53.342,37.941) 53.342,37.738 52.374,37.738 ccw(c52.374,37.534) 52.374,37.331 53.111,37.331 cw(c53.111,37.128) 53.314,37.128 53.314,36.765 53.592,36.487 v1(53.752,36.327)
SDRAM_A8: R48.1 U13.33 | length 57.3
  Top Layer w0.152: v1(34.414,44.477) 34.418,44.474 35.744,44.474 U13.33@35.748,44.47 ; R48.1@53.237,34.705 53.239,34.707 v1(53.869,34.707)
  Bottom Layer w0.152: v1(34.414,44.477) 35.013,45.076 35.631,45.076 36.114,45.076 cw(c36.114,44.873) 36.317,44.873 36.317,44.278 ccw(c36.52,44.278) 36.723,44.278 36.723,45.083 cw(c36.927,45.083) 37.13,45.083 37.13,44.278 ccw(c37.333,44.278) 37.536,44.278 37.536,45.083 cw(c37.739,45.083) 37.943,45.083 37.943,44.278 ccw(c38.146,44.278) 38.349,44.278 38.349,45.083 cw(c38.552,45.083) 38.755,45.083 38.755,44.278 ccw(c38.959,44.278) 39.162,44.278 39.162,45.083 cw(c39.365,45.083) 39.568,45.083 39.568,44.278 ccw(c39.771,44.278) 39.975,44.278 39.975,45.083 cw(c40.178,45.083) 40.381,45.083 40.381,44.278 ccw(c40.584,44.278) 40.787,44.278 40.787,45.083 cw(c40.991,45.083) 41.194,45.083 41.194,44.278 ccw(c41.397,44.278) 41.6,44.278 41.6,45.083 cw(c41.803,45.083) 42.007,45.083 42.007,44.278 ccw(c42.21,44.278) 42.413,44.278 42.413,45.083 cw(c42.616,45.083) 42.819,45.083 42.819,44.278 ccw(c43.023,44.278) 43.226,44.278 43.226,45.083 cw(c43.429,45.083) 43.632,45.083 43.632,44.278 ccw(c43.835,44.278) 44.039,44.278 44.039,45.083 cw(c44.242,45.083) 44.445,45.083 44.445,44.278 ccw(c44.648,44.278) 44.851,44.278 44.851,45.083 cw(c45.055,45.083) 45.258,45.083 45.258,44.278 ccw(c45.461,44.278) 45.664,44.278 45.664,45.083 cw(c45.867,45.083) 46.071,45.083 46.071,44.278 ccw(c46.274,44.278) 46.477,44.278 46.477,45.083 cw(c46.68,45.083) 46.883,45.083 46.883,44.393 ccw(c47.087,44.393) 47.29,44.393 47.29,44.873 cw(c47.493,44.873) 47.493,45.076 47.857,45.076 48.515,45.076 51.521,42.069 51.521,37.053 53.867,34.707 v1(53.869,34.707)
SDRAM_A9: U1.67 U13.34 | length 66.2
  Top Layer w0.152: v1(31.332,49.952) 31.332,49.737 31.332,49.387 ccw(c31.536,49.387) 31.536,49.184 32.272,49.184 cw(c32.272,48.981) 32.272,48.778 31.177,48.778 ccw(c31.177,48.574) 31.177,48.371 32.272,48.371 cw(c32.272,48.168) 32.272,47.965 31.177,47.965 ccw(c31.177,47.762) 31.177,47.558 32.272,47.558 cw(c32.272,47.355) 32.272,47.152 31.177,47.152 ccw(c31.177,46.949) 31.177,46.746 32.272,46.746 cw(c32.272,46.542) 32.272,46.339 31.536,46.339 ccw(c31.536,46.136) 31.332,46.136 31.332,45.653 31.332,45.505 31.569,45.268 U13.34@35.748,45.268 ; v1(43.34,51.79) 47.226,51.79 47.302,51.79 ccw(c47.302,51.993) 47.506,51.993 47.506,52.12 cw(c47.709,52.12) 47.912,52.12 47.912,51.929 ccw(c48.115,51.929) 48.318,51.929 48.318,52.12 cw(c48.522,52.12) 48.725,52.12 48.725,51.929 ccw(c48.928,51.929) 49.131,51.929 49.131,52.12 cw(c49.334,52.12) 49.538,52.12 49.538,51.929 ccw(c49.741,51.929) 49.944,51.929 49.944,52.12 cw(c50.147,52.12) 50.35,52.12 50.35,51.929 ccw(c50.554,51.929) 50.757,51.929 50.757,52.12 cw(c50.96,52.12) 51.163,52.12 51.163,51.929 ccw(c51.366,51.929) 51.57,51.929 51.57,52.511 cw(c51.773,52.511) 51.976,52.511 51.976,51.823 ccw(c52.179,51.823) 52.382,51.823 52.382,52.298 cw(c52.586,52.298) 52.789,52.298 52.789,51.993 ccw(c52.992,51.993) 52.992,51.79 53.381,51.79 53.648,51.79 53.756,51.79 ccw(c53.756,52.137) 54,51.891 54.504,52.395 cw(c54.648,52.251) 54.792,52.395 cw(c54.648,52.251) 54.792,52.107 53.795,51.111 ccw(c53.939,50.967) 53.795,50.824 ccw(c53.939,50.967) 54.082,50.824 54.521,51.262 cw(c54.665,51.119) 54.809,51.262 cw(c54.665,51.119) 54.809,50.975 54.37,50.536 ccw(c54.513,50.392) 54.37,50.249 ccw(c54.513,50.392) 54.657,50.249 55.14,50.732 cw(c55.284,50.588) 55.428,50.732 cw(c55.284,50.588) 55.428,50.445 55.082,50.099 ccw(c55.225,49.955) 55.082,49.811 ccw(c55.225,49.955) 55.369,49.811 55.411,49.853 cw(c55.555,49.709) 55.698,49.853 56.459,49.093 57.298,48.253 57.298,46.453 59.085,44.667 U1.67@60.466,44.667
  Bottom Layer w0.152: v1(31.332,49.952) 32.504,51.124 42.674,51.124 v1(43.34,51.79)
SDRAM_A10: U1.71 U13.22 | length 66.3
  Top Layer w0.152: U13.22@24.064,44.47 24.068,44.474 25.466,44.474 v1(25.47,44.479) ; v1(43.463,50.762) 44.147,51.447 51.754,51.447 56.46,46.741 56.46,46.106 59.299,43.267 U1.71@60.466,43.267
  Bottom Layer w0.152: v1(25.47,44.479) 25.47,45.657 25.47,45.733 ccw(c25.267,45.733) 25.267,45.936 24.429,45.936 cw(c24.429,46.139) 24.429,46.342 26.309,46.342 ccw(c26.309,46.546) 26.309,46.749 24.429,46.749 cw(c24.429,46.952) 24.429,47.155 26.309,47.155 ccw(c26.309,47.358) 26.309,47.562 24.429,47.562 cw(c24.429,47.765) 24.429,47.968 26.309,47.968 ccw(c26.309,48.171) 26.309,48.374 24.429,48.374 cw(c24.429,48.578) 24.429,48.781 25.282,48.781 ccw(c25.282,48.984) 25.426,48.84 25.857,49.272 25.884,49.299 26.494,49.299 26.57,49.299 ccw(c26.57,49.502) 26.773,49.502 26.773,49.943 cw(c26.976,49.943) 27.18,49.943 27.18,49.032 ccw(c27.383,49.032) 27.586,49.032 27.586,49.943 cw(c27.789,49.943) 27.992,49.943 27.992,49.032 ccw(c28.196,49.032) 28.399,49.032 28.399,49.906 cw(c28.602,49.906) 28.805,49.906 28.805,49.502 ccw(c29.008,49.502) 29.008,49.299 29.877,49.299 31.592,49.299 33.055,50.762 v1(43.463,50.762)
SDRAM_A11: U1.72 U13.35 | length 66.3
  Top Layer w0.152: v1@34.291,46.073 U13.35@35.751,46.073 ; v1(45.197,50.949) 51.856,50.949 56.181,46.625 56.181,45.99 59.254,42.917 U1.72@60.466,42.917
  Bottom Layer w0.152: v1(34.291,46.094) 33.858,46.094 33.782,46.094 ccw(c33.782,45.891) 33.579,45.891 33.579,45.874 cw(c33.375,45.874) 33.172,45.874 33.172,46.395 ccw(c32.969,46.395) 32.766,46.395 32.766,45.874 cw(c32.563,45.874) 32.359,45.874 32.359,46.395 ccw(c32.156,46.395) 31.953,46.395 31.953,45.874 cw(c31.75,45.874) 31.547,45.874 31.547,46.395 ccw(c31.343,46.395) 31.14,46.395 31.14,45.874 cw(c30.937,45.874) 30.734,45.874 30.734,46.395 ccw(c30.531,46.395) 30.327,46.395 30.327,45.874 cw(c30.124,45.874) 29.921,45.874 29.921,47.01 ccw(c29.718,47.01) 29.515,47.01 29.515,45.122 cw(c29.311,45.122) 29.108,45.122 29.108,47.01 ccw(c28.905,47.01) 28.702,47.01 28.702,45.122 cw(c28.499,45.122) 28.295,45.122 28.295,46.917 ccw(c28.092,46.917) 27.889,46.917 27.889,46.297 cw(c27.686,46.297) 27.686,46.094 27.052,46.094 26.993,46.094 26.846,46.241 26.846,47.364 27,47.518 29.647,47.518 29.908,47.779 29.908,48.641 30.226,48.958 33.088,48.958 34.439,50.309 44.556,50.309 v1(45.197,50.949)
SDRAM_A12: U1.73 U13.36 | length 66.2
  Top Layer w0.152: v1(33.724,46.878) 33.728,46.874 35.744,46.874 U13.36@35.748,46.87 ; v1(45.639,50.29) 45.975,50.29 46.458,50.29 cw(c46.458,50.087) 46.661,50.087 46.661,49.35 ccw(c46.864,49.35) 47.067,49.35 47.067,50.467 cw(c47.271,50.467) 47.474,50.467 47.474,49.35 ccw(c47.677,49.35) 47.88,49.35 47.88,50.467 cw(c48.083,50.467) 48.287,50.467 48.287,49.35 ccw(c48.49,49.35) 48.693,49.35 48.693,50.467 cw(c48.896,50.467) 49.099,50.467 49.099,49.35 ccw(c49.303,49.35) 49.506,49.35 49.506,50.467 cw(c49.709,50.467) 49.912,50.467 49.912,49.35 ccw(c50.115,49.35) 50.319,49.35 50.319,50.467 cw(c50.522,50.467) 50.725,50.467 50.725,49.386 ccw(c50.928,49.386) 51.131,49.386 51.131,50.087 cw(c51.335,50.087) 51.335,50.29 52.107,50.29 52.175,50.222 55.901,46.495 55.901,45.874 59.209,42.567 U1.73@60.466,42.567
  Bottom Layer w0.152: v1(33.724,46.878) 30.643,46.878 30.387,47.135 30.387,48.205 30.71,48.528 33.271,48.528 34.205,49.462 34.678,49.462 34.754,49.462 ccw(c34.754,49.665) 34.958,49.665 34.958,49.737 cw(c35.161,49.737) 35.364,49.737 35.364,49.482 ccw(c35.567,49.482) 35.77,49.482 35.77,49.737 cw(c35.974,49.737) 36.177,49.737 36.177,49.482 ccw(c36.38,49.482) 36.583,49.482 36.583,49.737 cw(c36.786,49.737) 36.99,49.737 36.99,49.482 ccw(c37.193,49.482) 37.396,49.482 37.396,49.737 cw(c37.599,49.737) 37.802,49.737 37.802,49.482 ccw(c38.006,49.482) 38.209,49.482 38.209,49.737 cw(c38.412,49.737) 38.615,49.737 38.615,49.482 ccw(c38.818,49.482) 39.022,49.482 39.022,49.737 cw(c39.225,49.737) 39.428,49.737 39.428,49.482 ccw(c39.631,49.482) 39.834,49.482 39.834,49.737 cw(c40.038,49.737) 40.241,49.737 40.241,49.482 ccw(c40.444,49.482) 40.647,49.482 40.647,49.737 cw(c40.85,49.737) 41.054,49.737 41.054,49.482 ccw(c41.257,49.482) 41.46,49.482 41.46,49.737 cw(c41.663,49.737) 41.866,49.737 41.866,49.482 ccw(c42.07,49.482) 42.273,49.482 42.273,49.533 cw(c42.476,49.533) 42.679,49.533 42.679,49.482 ccw(c42.882,49.482) 43.086,49.482 43.086,49.665 cw(c43.289,49.665) 43.492,49.665 ccw(c43.695,49.665) 43.695,49.462 44.125,49.462 44.811,49.462 v1(45.639,50.29)
SDRAM_BA0: U1.46 U13.20 | length 66.3
  Top Layer w0.152: U13.20@24.064,46.07 27.18,46.07 29.014,47.904 29.014,57.695 v1(29.618,58.299) ; v1(42.288,58.667) 42.949,58.667 44.638,60.357 61.384,60.357 68.068,53.673 68.068,49.933 67.439,49.304 67.439,46.844 67.491,46.792 U1.46@67.491,46.092
  Bottom Layer w0.152: v1(29.618,58.299) 29.643,58.274 36.07,58.274 36.463,58.667 v1(42.288,58.667)